# EAGLE board Simple_MCU_V01 (EAGLE 7.7.0)
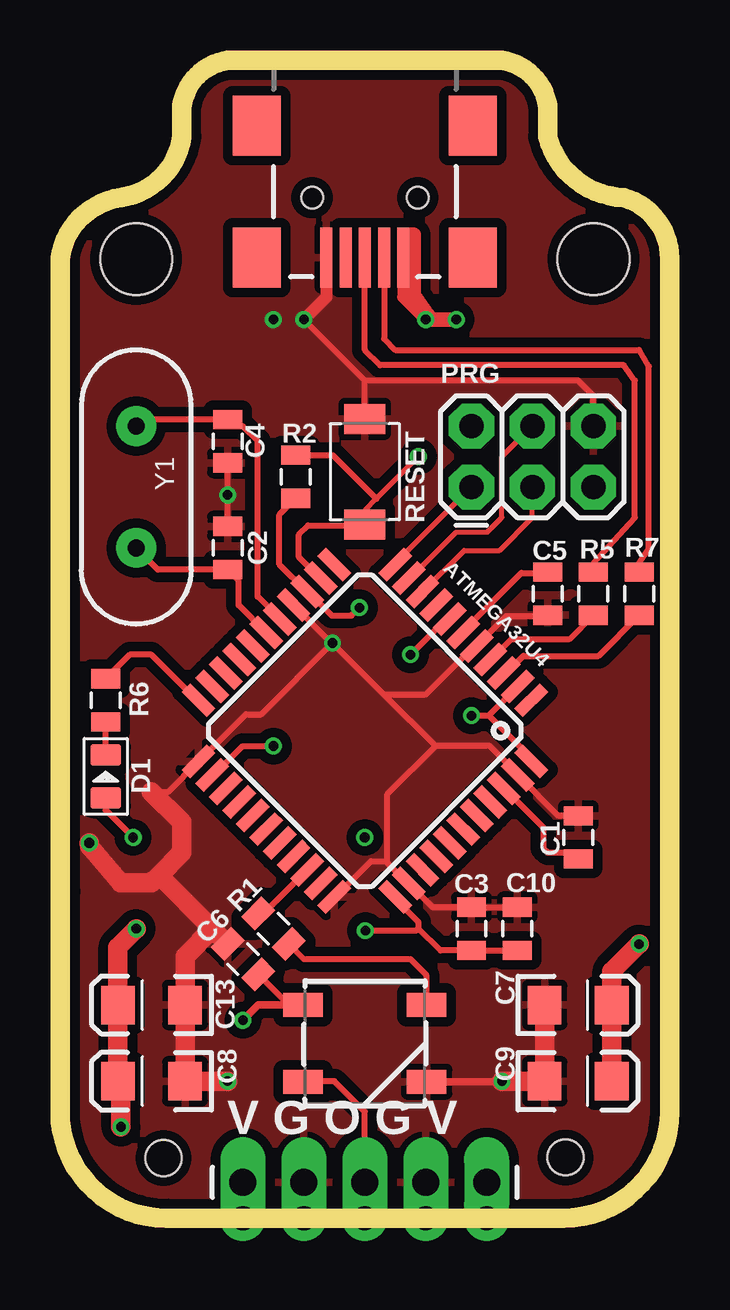
[diagram p0: board, top side]
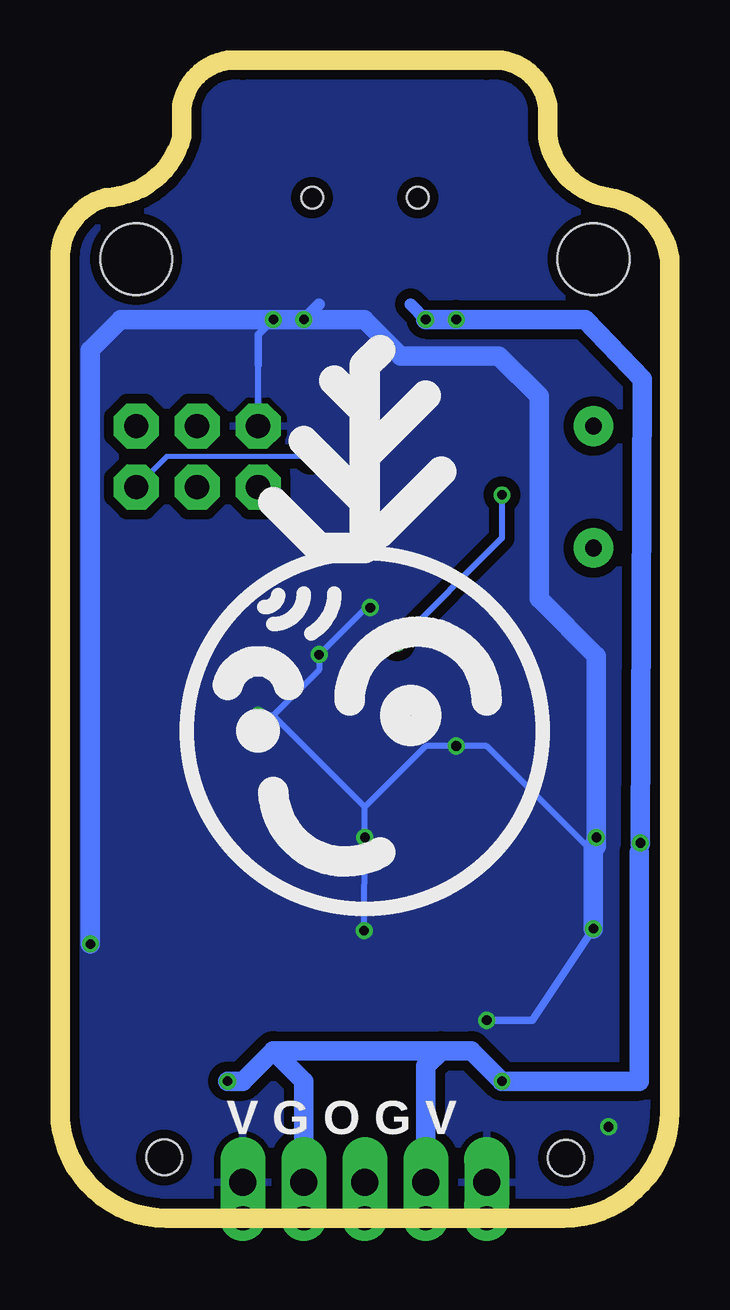
[diagram p1: board, bottom side, seen from below]

Size 25.4 x 48.28 mm. Coordinates in mm from the lower left corner, seen from the top.
Outline: 4.45,0 20.96,0 arc90 25.4,4.45 25.4,40.01 arc74 23.5,42.55 arc-74 20.32,45.09 20.32,46.35 arc90 17.78,48.26 7.62,48.26 arc90 5.08,46.35 5.08,45.09 arc-74 2.54,42.55 arc74 0,40.01 0,4.45 arc90 4.45,0
Copper layers (1*16): Top 0.035mm / dielectric 1.5mm / Bottom 0.035mm
Design rules "SeeedStudio_2layer_DRU_no_angle_20140221": minimum track width 6mil, minimum drill 12mil, track to track 6mil, track to pad 6mil, pad to pad 6mil, via to via 6mil, smd to smd 0mil, copper to edge 10mil, drill to drill 10mil, minimum pad ring 10mil, minimum via ring 6mil, stop-mask expansion 2mil, vias tented up to drill 100mil, thermal gap 10mil
Net classes: 0 default: width 0.203 mm
Holes 1.5 mm at 4.32,2.51 21.06,2.54
Holes 3 mm at 22.22,39.98 3.18,39.98
tRestrict: area -3.6,9.6 to -3.4,9.7; area 0.4,13.6 to 0.4,13.7; area -7.2,10.3 to -0.1,17.6

## Footprints (pad centres in the part's own frame; a part is rotated, then mirrored left to right if it is on the bottom)
TQFP44 = smd 1.5 x 0.5: 1 -5.8,4; 2 -5.8,3.2; 3 -5.8,2.4; 4 -5.8,1.6; 5 -5.8,0.8; 6 -5.8,0; 7 -5.8,-0.8; 8 -5.8,-1.6; 9 -5.8,-2.4; 10 -5.8,-3.2; 11 -5.8,-4; 23 5.8,-4; 24 5.8,-3.2; 25 5.8,-2.4; 26 5.8,-1.6; 27 5.8,-0.8; 28 5.8,0; 29 5.8,0.8; 30 5.8,1.6; 31 5.8,2.4; 32 5.8,3.2; 33 5.8,4 | smd 0.5 x 1.5: 12 -4,-5.8; 13 -3.2,-5.8; 14 -2.4,-5.8; 15 -1.6,-5.8; 16 -0.8,-5.8; 17 0,-5.8; 18 0.8,-5.8; 19 1.6,-5.8; 20 2.4,-5.8; 21 3.2,-5.8; 22 4,-5.8; 34 4,5.8; 35 3.2,5.8; 36 2.4,5.8; 37 1.6,5.8; 38 0.8,5.8; 39 0,5.8; 40 -0.8,5.8; 41 -1.6,5.8; 42 -2.4,5.8; 43 -3.2,5.8; 44 -4,5.8
0805 = smd 0.8 x 1.2: 1 -0.9,0; 2 0.9,0
EIA3216 = smd 1.4 x 1.6: A 1.4,0; C -1.4,0
LED-0805 = smd 0.889 x 1.27: + -0.889,0; - 0.889,0
WS2812B = smd 1.651 x 1: 1 -2.577,1.6; 2 -2.577,-1.6; 3 2.577,-1.6; 4 2.577,1.6
1X05_NO_SILK = drill 1.016 pad 1.88: 1 0,0; 2 2.54,0; 3 5.08,0; 4 7.62,0; 5 10.16,0
USB-MINIB = smd 2.5 x 0.5: D+ 2.5,0; D- 2.5,0.8; GND 2.5,-1.6; ID 2.5,-0.8; VBUS 2.5,1.6 | smd 2.5 x 2: MTN1 -3,4.5; MTN2 2.5,4.5; MTN3 -3,-4.5; MTN4 2.5,-4.5 | hole 0.9: 0,2.2; 0,-2.2
1X05_LONGPADS = drill 1.118 pad 1.88 long: 1 0,0; 2 2.54,0; 3 5.08,0; 4 7.62,0; 5 10.16,0
2X3 = drill 1.016 pad 1.88 octagon: 1 0,0; 2 0,2.54; 3 2.54,0; 4 2.54,2.54; 5 5.08,0; 6 5.08,2.54
SW2-4.0X3.0X2.0 = smd 1.25 x 1.7: 1 -2.2,0; 2 2.2,0
HC49US = drill 0.7 pad 1.651: 1 -2.54,0; 2 2.54,0

## Placement (x,y rotation side)
ATMEGA32U4  ATMEGA32U4TQFP-44  [TQFP44]  12.7,20.32 225 top
C1  0.1uF  [0805]  21.59,15.88 270 top
C2  22pF  [0805]  6.98,27.94 90 top
C3  0.1uF  [0805]  17.14,12.06 270 top
C4  22pF  [0805]  6.98,32.38 270 top
C5  1uF  [0805]  20.32,26.04 90 top
C6  0.1uF  [0805]  7.62,10.79 315 top
C7  10uF  [EIA3216]  21.59,8.89 0 top
C8  10uF  [EIA3216]  3.81,5.71 180 top
C9  10uF  [EIA3216]  21.59,5.71 0 top
C10  1uF  [0805]  19.05,12.06 90 top
C13  10uF  [EIA3216]  3.81,8.89 180 top
D1  GREEN-0805  [LED-0805]  1.91,18.41 90 top
D3  [WS2812B]  12.7,7.29 0 top
J1  [1X05_NO_SILK]  17.78,0 180 top
J3  USB-MINIB-5PIN  [USB-MINIB]  12.7,42.55 270 top
J4  [1X05_LONGPADS]  17.78,1.5 180 top
PRG  AVR_SPI_PRG_6PTH  [2X3]  17.14,30.48 0 top
R1  1k  [0805]  8.89,12.06 315 top
R2  10K  [0805]  9.82,30.91 270 top
R5  22  [0805]  22.22,26.04 90 top
R6  1k  [0805]  1.91,21.59 270 top
R7  22  [0805]  24.13,26.04 90 top
RESET  B3U-1000P-2P-SMD  [SW2-4.0X3.0X2.0]  12.7,31.11 270 top
Y1  16MHz  [HC49US]  3.18,30.48 270 top

## Library data of the parts
ATMEGA32U4 = SparkFun-DigitalIC
C1-C10 C13 R1 R2 R5-R7 Y1 = SparkFun
D1 = Seeed-LED-2016; MPN: 17-215SYGC/S530-E2/TR8
D3 = SparkFun-LED; PROD_ID: DIO-12503
J1 J4 PRG = SparkFun-Connectors
J3 = SparkFun-Connectors; PROD_ID: CONN-08193
RESET = SMD_Button_Custom; MPN: B3U-1000P-2P-SMD

## Nets
3.3V [vcc]: ATMEGA32U4.2 ATMEGA32U4.7 ATMEGA32U4.14 ATMEGA32U4.24 ATMEGA32U4.34 ATMEGA32U4.44 C3.2 C6.2 C7.A C8.A C9.A C10.1 C13.A D1.+ D3.1 J1.1 J1.5 J3.VBUS J4.1 J4.5 PRG.2 R2.2
A0: ATMEGA32U4.36
A1: ATMEGA32U4.37
A2: ATMEGA32U4.38
A3: ATMEGA32U4.39
A4: ATMEGA32U4.40
A5: ATMEGA32U4.41
AREF: ATMEGA32U4.42 C1.2
D2: ATMEGA32U4.19
D3: ATMEGA32U4.18
D4: ATMEGA32U4.25
D5: ATMEGA32U4.31 R1.1
D6: ATMEGA32U4.27
D7: ATMEGA32U4.1
D8: ATMEGA32U4.28
D9: ATMEGA32U4.29
D10: ATMEGA32U4.30
D11: ATMEGA32U4.12
D12: ATMEGA32U4.26
D13: ATMEGA32U4.32
D14: ATMEGA32U4.8
D+: ATMEGA32U4.4 R5.1
D-: ATMEGA32U4.3 R7.1
GND: ATMEGA32U4.5 ATMEGA32U4.15 ATMEGA32U4.23 ATMEGA32U4.33 ATMEGA32U4.35 ATMEGA32U4.43 C1.1 C2.2 C3.1 C4.2 C5.1 C6.1 C7.C C8.C C9.C C10.2 C13.C D3.3 J1.2 J1.4 J3.GND J4.2 J4.4 PRG.6 RESET.1
MISO: ATMEGA32U4.11 PRG.1
MOSI: ATMEGA32U4.10 PRG.4
N$1: ATMEGA32U4.16 C4.1 Y1.1
N$2: ATMEGA32U4.17 C2.1 Y1.2
N$3: D3.4 R1.2
N$4: ATMEGA32U4.6 C5.2
N$5: D3.2 J1.3 J4.3
N$6: J3.D- R7.2
N$7: D1.- R6.2
N$8: J3.D+ R5.2
RESET: ATMEGA32U4.13 PRG.5 R2.1 RESET.2
RXI: ATMEGA32U4.20
SCK: ATMEGA32U4.9 PRG.3
TXLED: ATMEGA32U4.22 R6.1
TXO: ATMEGA32U4.21

## Tracks (layer width: path | path; a pad name or v marks a point on that pad's centre or on a via)
3.3V  (via drill 0.4)
  Top 0.254: R2.2 9.14,29.33 9.14,27.25 10.28,26.12 ATMEGA32U4.14 10.33,26.12 11.33,25.12 12.14,25.12 v12.47,25.45 | ATMEGA32U4.7 16.11,25 v14.61,23.5 | v17.14,20.95 17.86,20.95 | 17.86,20.95 ATMEGA32U4.2 | 13.91,13.39 ATMEGA32U4.34 13.97,13.31 14.94,12.34 14.94,12.09 | ATMEGA32U4.24 6.42,18.48 7.62,19.68 v8.89,19.68 | ATMEGA32U4.44 19.63,19.19 17.86,20.95 | 14.94,12.09 14.83,11.99 v12.73,11.99 | D1.+ 1.91,17.02 v3.05,15.88 | 14.94,12.09 15.86,11.16 C3.2 C10.1 | D3.1 9.53,8.89 C6.2
  Top 0.305: D3.1 8.25,8.89 v7.62,8.26
  Top 0.508: J3.VBUS 14.3,38.41 v15.24,37.47
  Top 0.61: 14.5,41 14.73,41 14.73,38.51 15.32,37.67 v15.24,37.47 v16.51,37.47
  Top 0.813: v3.18,12.06 2.41,11.3 C13.A C8.A 2.54,5.58 v2.54,3.81 | C9.A C7.A 22.99,10.29 v24.13,11.43
  Bottom 0.254: PRG.2 17.14,35.56 | 16.51,20.95 14.61,22.86 v14.61,23.5 12.65,25.45 v12.47,25.45 | 16.51,20.95 v17.14,20.95 | 12.7,17.14 v12.7,15.88 v12.73,11.99 | 12.7,17.14 16.51,20.95 | 12.7,17.14 10.16,19.68 v8.89,19.68 7.62,19.68 3.4,15.47 3.07,15.47
  Bottom 0.305: v7.62,8.26 5.71,8.26 v3.18,12.06 | v16.51,37.47 17.14,36.83 17.14,35.56 | 17.14,35.56
  Bottom 0.508: v15.24,37.47 14.61,38.1
  Bottom 0.61: J4.5 J1.5 | J4.1 J1.1
  Bottom 0.813: v3.05,15.88 3.05,23.44 5.44,25.83 5.44,34.27 7.11,35.94 11.2,35.94 12.73,37.47 v15.24,37.47 v16.51,37.47 22.86,37.47 24.13,36.2 v24.13,11.43 | v3.05,15.88 3.05,15.49 3.07,15.47 | v3.18,12.06 3.18,15.37 v3.05,15.88
  pour Bottom (isolate 0.406): 0,0 25.4,0 25.4,41.91 20.32,43.81 20.32,48.26 5.08,48.26 5.08,43.81 0,41.91
AREF
  Top 0.254: ATMEGA32U4.42 20.14,16.28 20.14,15.42 20.32,15.24 21.32,15.24 C1.2
D5
  Top 0.254: R1.1 8.44,12.66 ATMEGA32U4.31
D+
  Top 0.254: ATMEGA32U4.4 17.96,23.29 18.82,24.16 21.25,24.16 R5.1
D-
  Top 0.254: ATMEGA32U4.3 18.58,22.72 19.3,23.44 22.44,23.44 R7.1
GND  (via drill 0.4)
  Top 0.254: C5.1 20.28,25.09 18.59,25.09 ATMEGA32U4.5 17.25,23.86 15.21,21.82 13.51,21.82 | v11.35,23.98 11.3,23.98 ATMEGA32U4.15 | C2.2 v6.98,30.15 C4.2 | PRG.6 22.22,34.29 21.59,34.92 12.7,34.92 | 12.7,34.92 v10.16,37.47 | RESET.1 12.7,34.92 | 13.51,21.82 v11.35,23.98 | v11.35,23.98 8.38,21.01 7.75,21.01 5.79,19.05 ATMEGA32U4.23 4.5,17.78 3.81,17.78 | 15.65,19.68 17.91,19.68 19.06,18.53 ATMEGA32U4.43 20.77,16.77 C1.1 | 15.65,19.68 13.51,21.82 | 13.64,14.81 14.49,13.96 ATMEGA32U4.35 15.53,12.96 C3.1 C10.2 | 13.64,14.81 13.64,17.68 15.65,19.68 | ATMEGA32U4.33 11.46,13.39 12.95,14.88 13.56,14.88 13.64,14.81
  Top 0.305: D3.3 18.39,5.69 v18.41,5.71
  Top 0.508: J3.GND 11.1,38.41 v10.16,37.47
  Top 0.813: v1.22,15.65 1.25,15.49 2.54,13.97 3.81,13.97 4.13,14.29 | 4.13,14.29 5.08,15.24 5.08,16.51 3.81,17.78 | 6.35,12.06 5.21,10.93 C13.C C8.C v6.98,5.71 | 6.35,12.06 C6.1 | 6.35,12.06 | 6.35,12.06 4.13,14.29 | C7.C C9.C v18.41,5.71 | J4.4 J1.4 | J4.2 J1.2
  Bottom 0.254: v11.35,23.98 6.98,28.35 v6.98,30.15
  Bottom 0.508: v10.16,37.47 10.8,38.1
  Bottom 0.813: v10.16,37.47 v8.89,37.47 3.5,37.47 1.14,34.98 v1.22,15.65 1.22,15.6 | v18.41,5.71 17.78,5.71 16.51,6.99 | 16.51,6.99 9.53,6.99 | 9.53,6.99 8.25,6.99 v6.98,5.71 1.27,5.71 1.27,15.24 | J4.4 10.16,6.35 9.53,6.99 | J4.2 15.24,5.71 16.51,6.99
  pour Top (isolate 0.406): 0,0 25.4,0 25.4,41.91 20.32,43.81 20.32,48.26 5.08,48.26 5.08,43.81 0,41.91
MISO
  Top 0.203: ATMEGA32U4.11 13.97,27.31 PRG.1
MOSI
  Top 0.203: ATMEGA32U4.10 14.59,26.68 16.51,28.6 17.8,28.6 18.41,29.21 18.41,31.75 PRG.4
N$1
  Top 0.254: Y1.1 3.44,33.28 C4.1 7.25,33.02 7.62,33.02 8.23,32.41 8.23,25.91 ATMEGA32U4.16
N$2
  Top 0.254: ATMEGA32U4.17 8.57,24.42 7.44,25.55 7.44,26.58 C2.1 4.07,27.04 Y1.2
N$3
  Top 0.254: D3.4 15.28,10.12 14.61,10.79 10.16,10.79 R1.2
N$4
  Top 0.254: ATMEGA32U4.6 16.8,24.47 19.23,26.9 20.28,26.9 C5.2
N$5
  Top 0.254: J4.3 12.7,4.45 11.43,5.71 10.15,5.71 D3.2
  Top 0.813: J4.3 J1.3
N$6
  Top 0.254: R7.2 24.13,27.3 24.54,27.89 24.54,35.51 24.13,36.2 13.97,36.2 13.5,36.66 J3.D-
N$7
  Top 0.254: D1.- R6.2
N$8
  Top 0.254: R5.2 22.22,27.3 23.95,29.21 23.95,34.92 23.5,35.56 13.34,35.56 12.7,36.2 J3.D+
RESET  (via drill 0.4)
  Top 0.203: RESET.2 12.73,29.55 13.18,30 v14.94,31.75
  Top 0.254: R2.1 11.37,31.81 13.18,30 | ATMEGA32U4.13 10.83,26.68 9.96,27.56 9.96,28.5 10.34,28.88 12.66,28.88 RESET.2
  Bottom 0.203: v14.94,31.75 20.96,31.75 PRG.5
SCK
  Top 0.203: ATMEGA32U4.9 15.12,26.12 16.84,27.84 18.31,27.84 19.68,29.21 PRG.3 | PRG.3
TXLED
  Top 0.254: ATMEGA32U4.22 5.71,21.59 3.81,23.5 2.91,23.5 R6.1

## Text on the board
tPlace: V G O G V
bPlace: V G O G V